# Altium PCB PCB1.PcbDoc
Units mm, origin at the board's own origin, x right, y up, seen from the top; angles counter-clockwise.
Board outline 46.6 x 46.1 mm, 4 copper layers (Top Layer, Int1 (GND), Int2 (GND), Bottom Layer), stack 1.369 mm thick; 70 components, 49 nets, 271 pads, 118 vias.
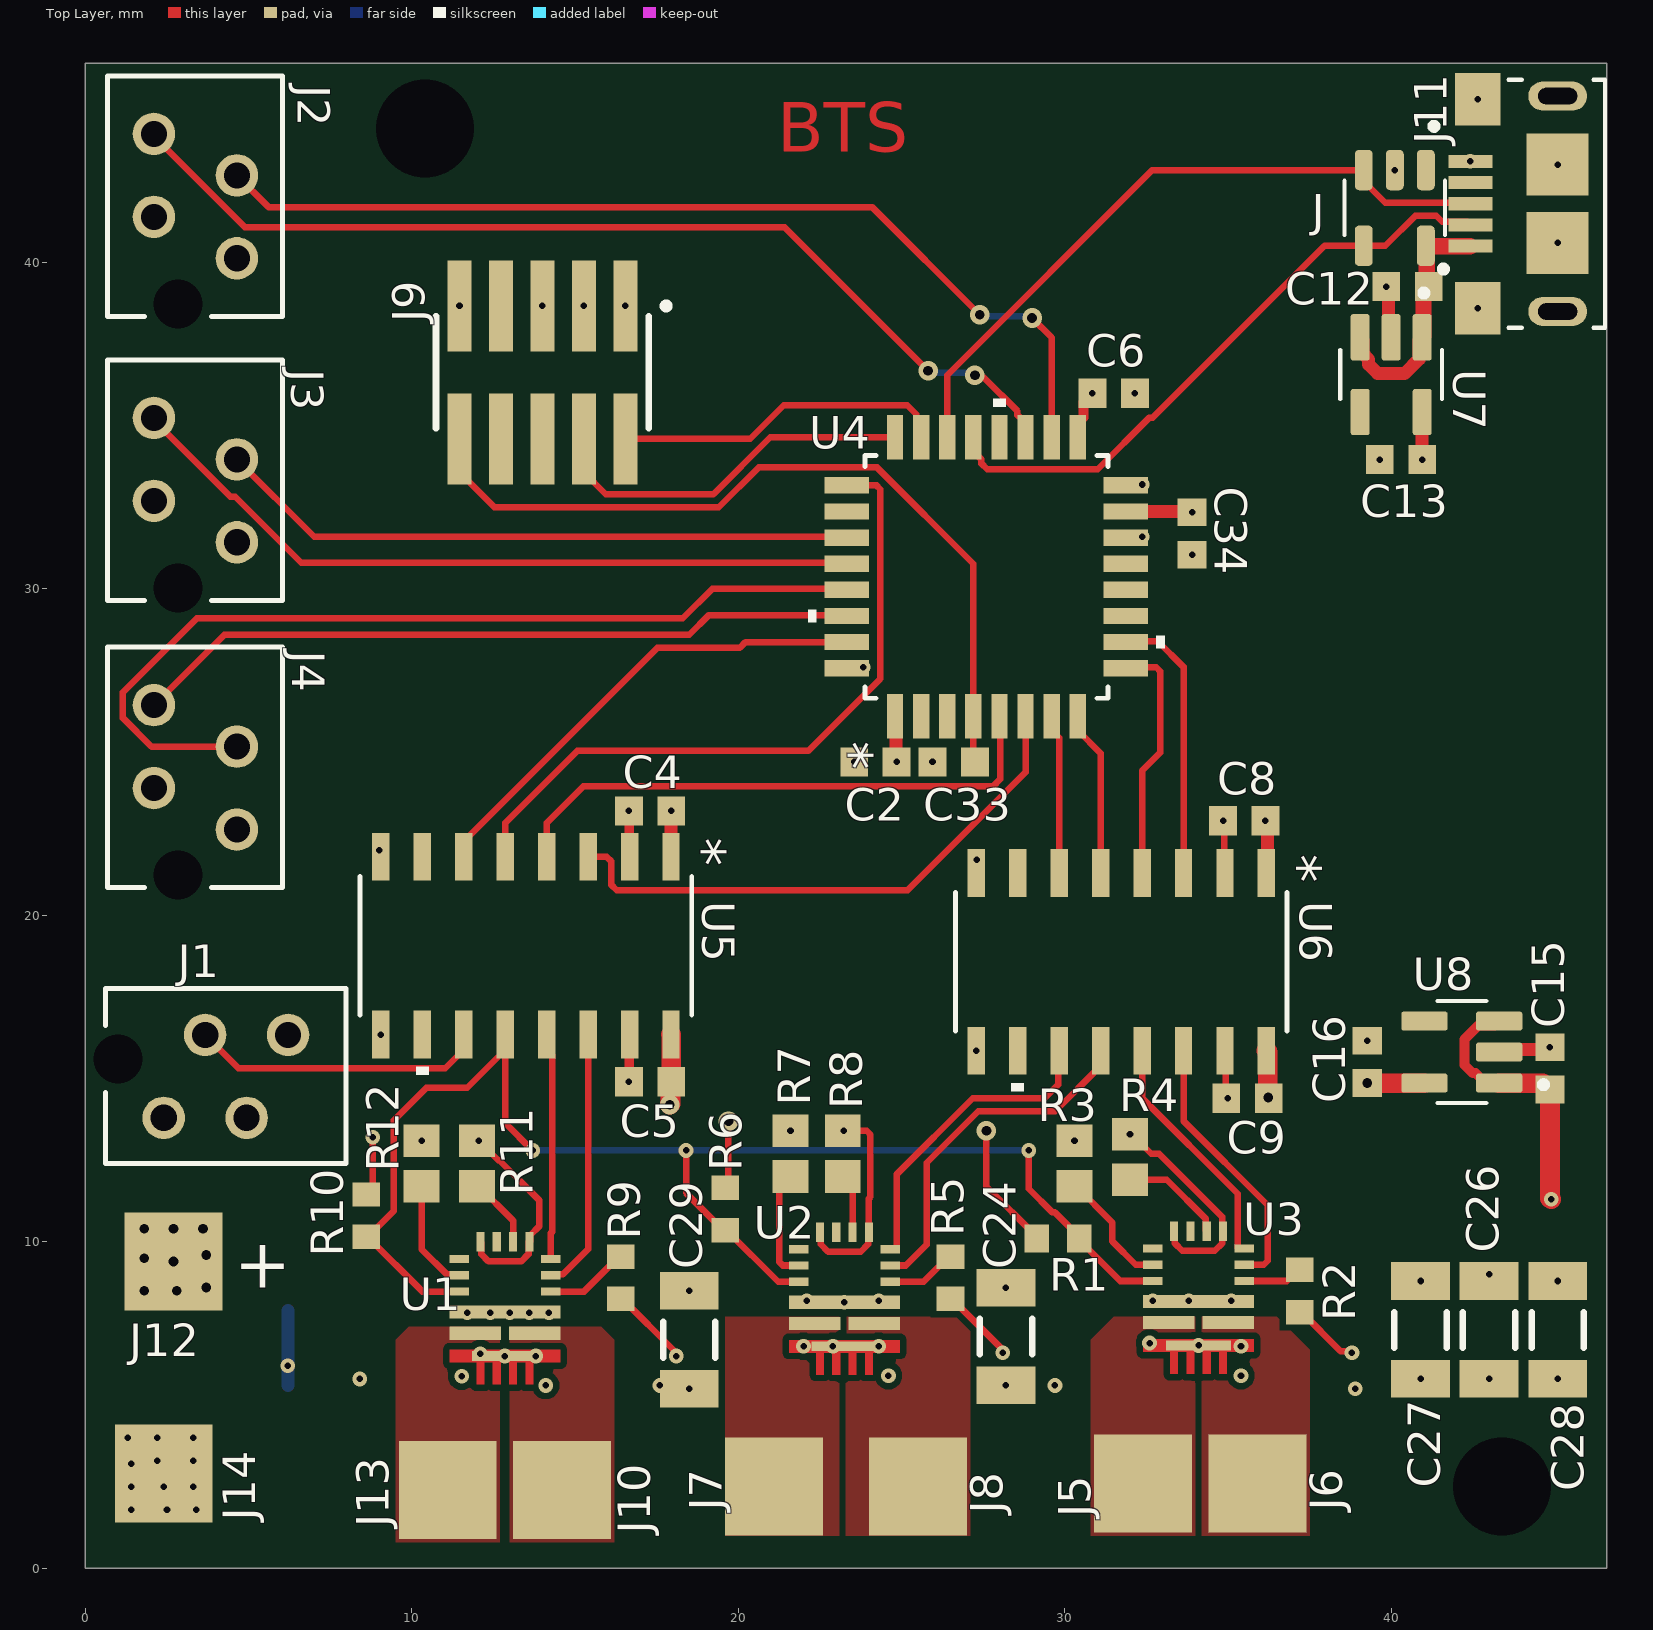
[diagram p0: Top Layer view]
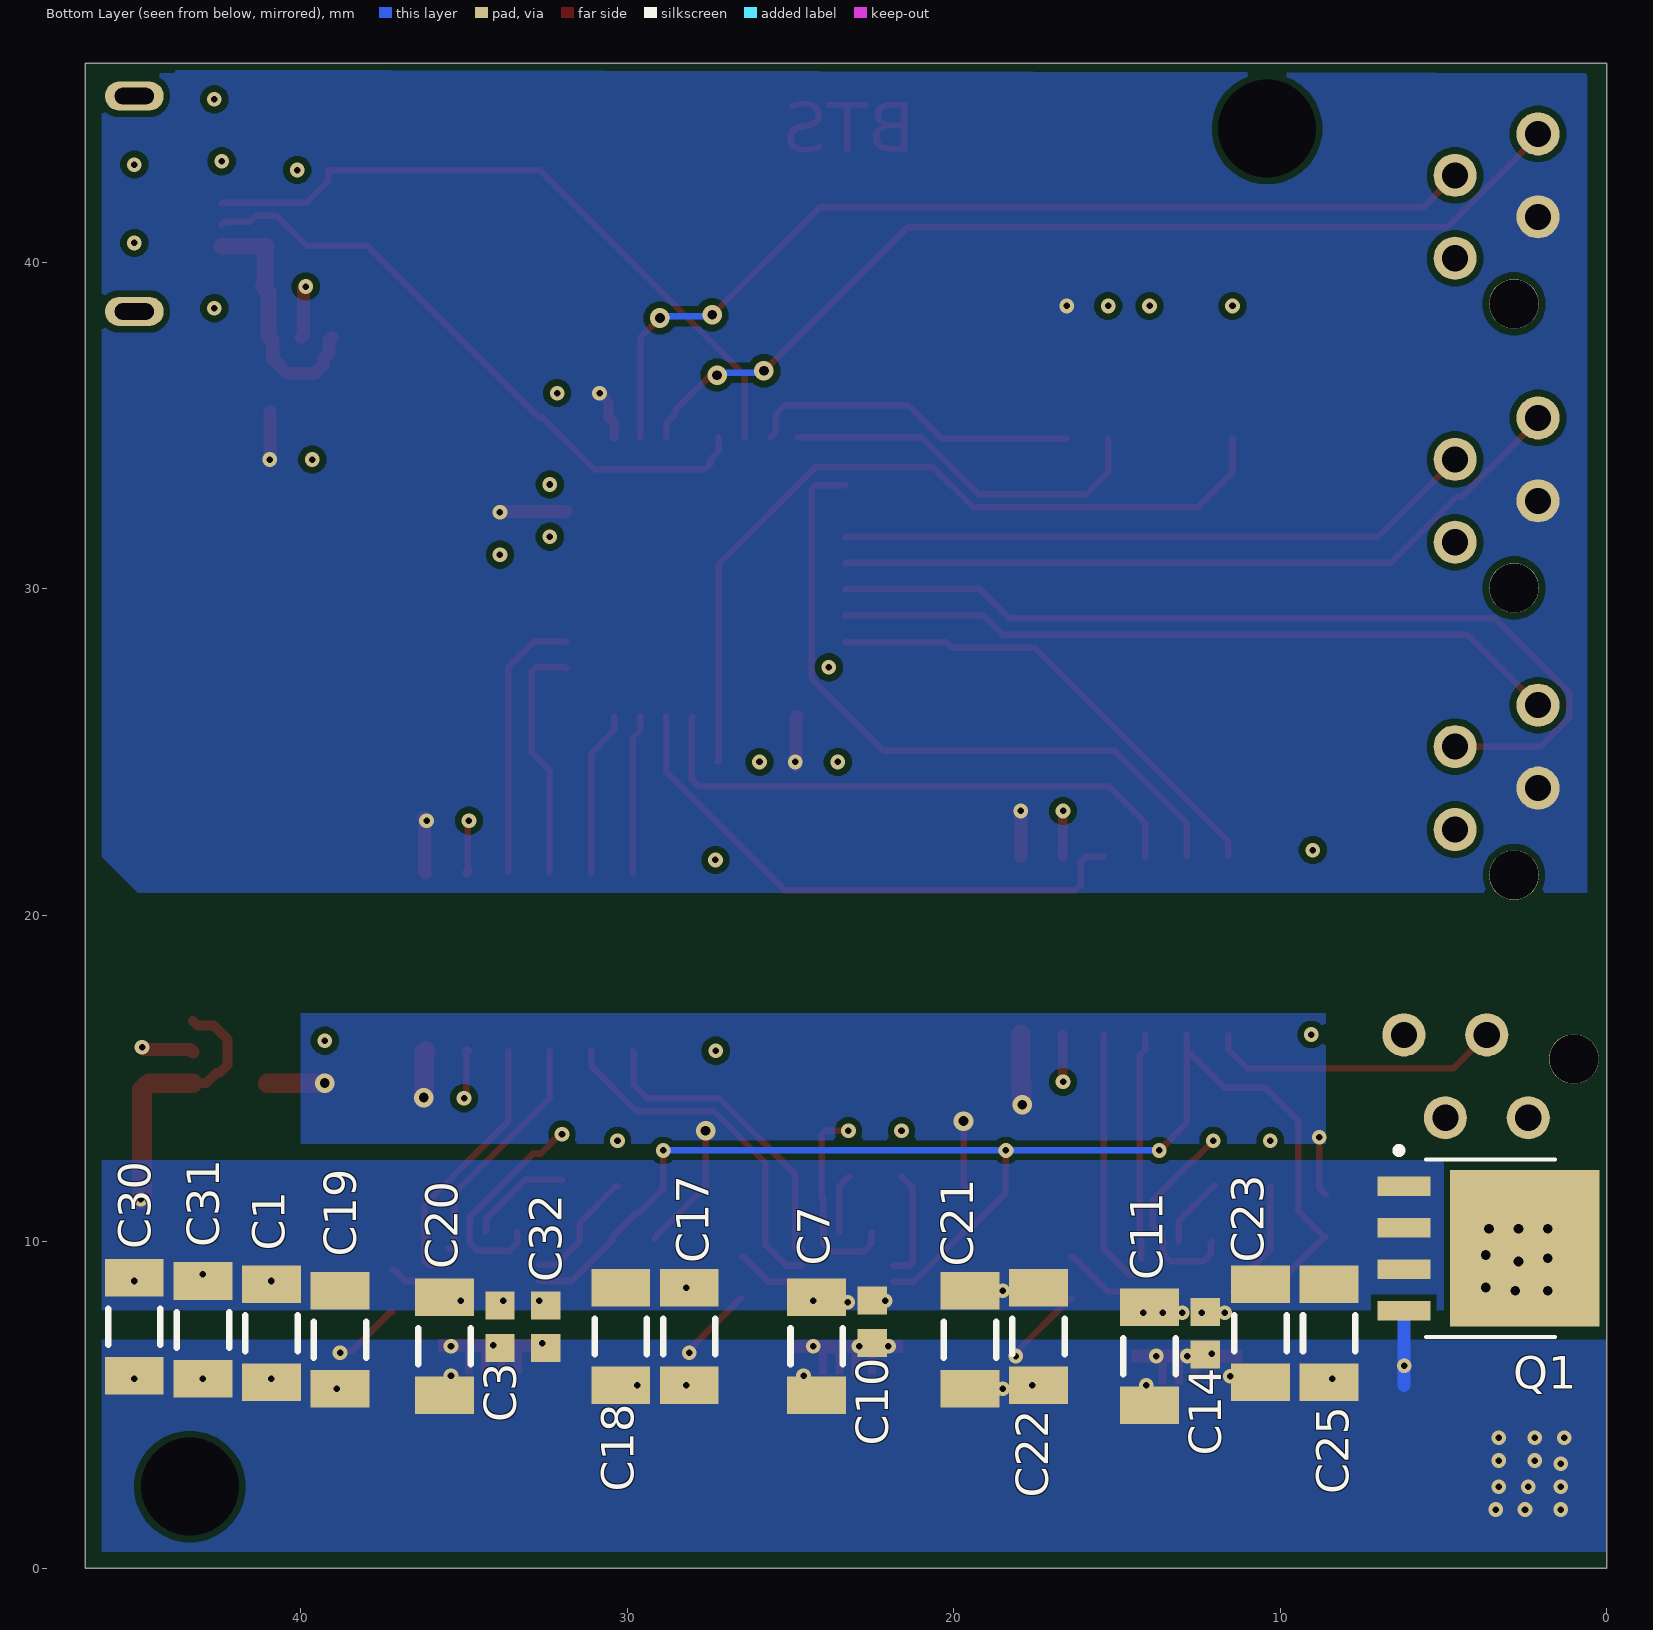
[diagram p1: Bottom Layer view, seen from below]
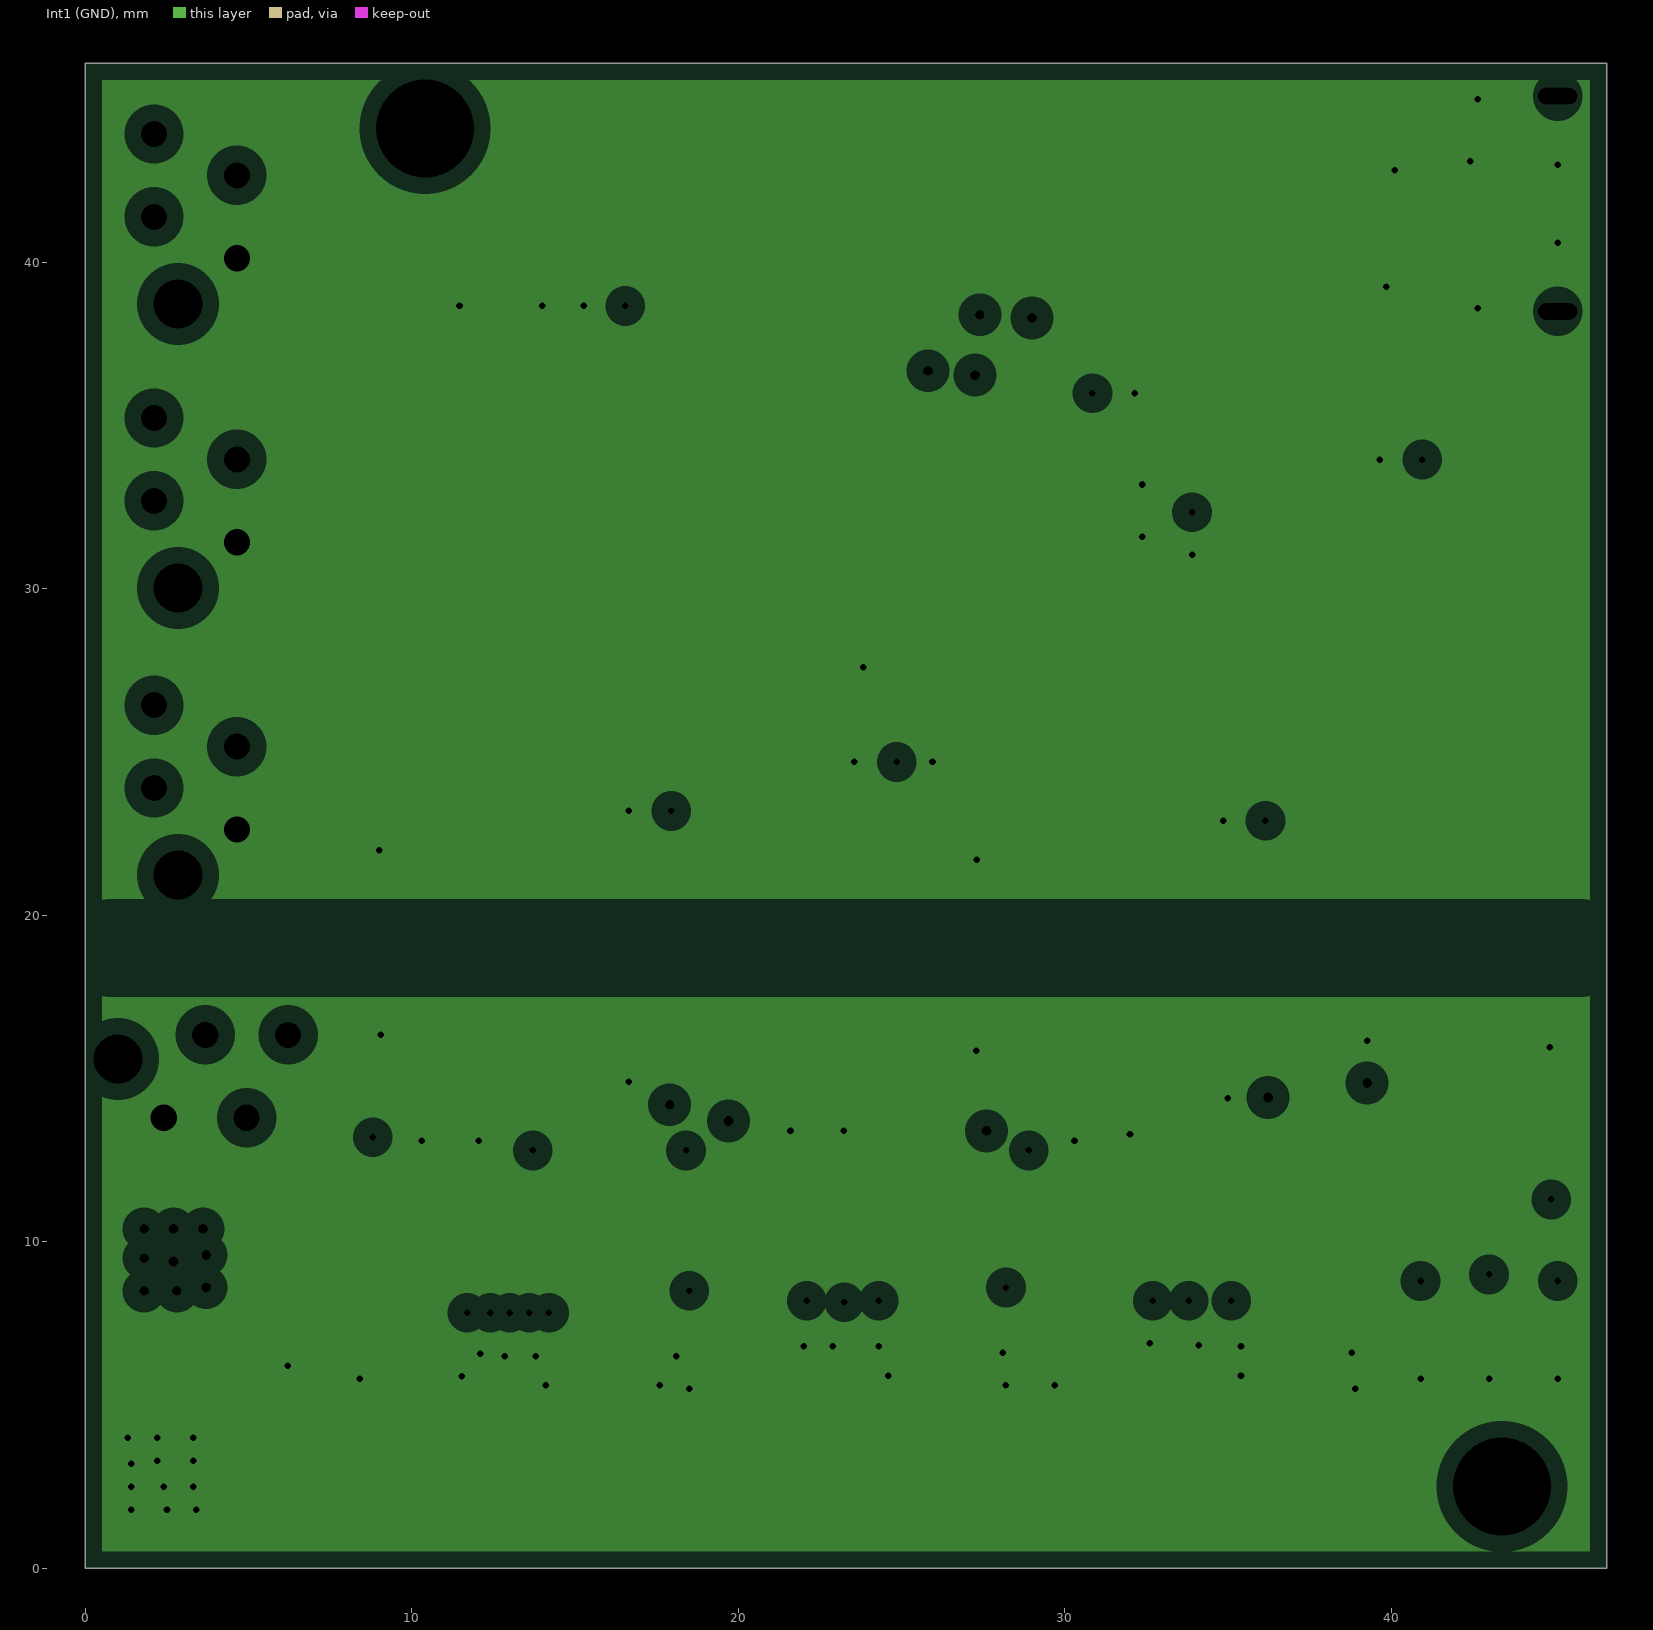
[diagram p2: Int1 (GND), clearances drawn from the general rule]
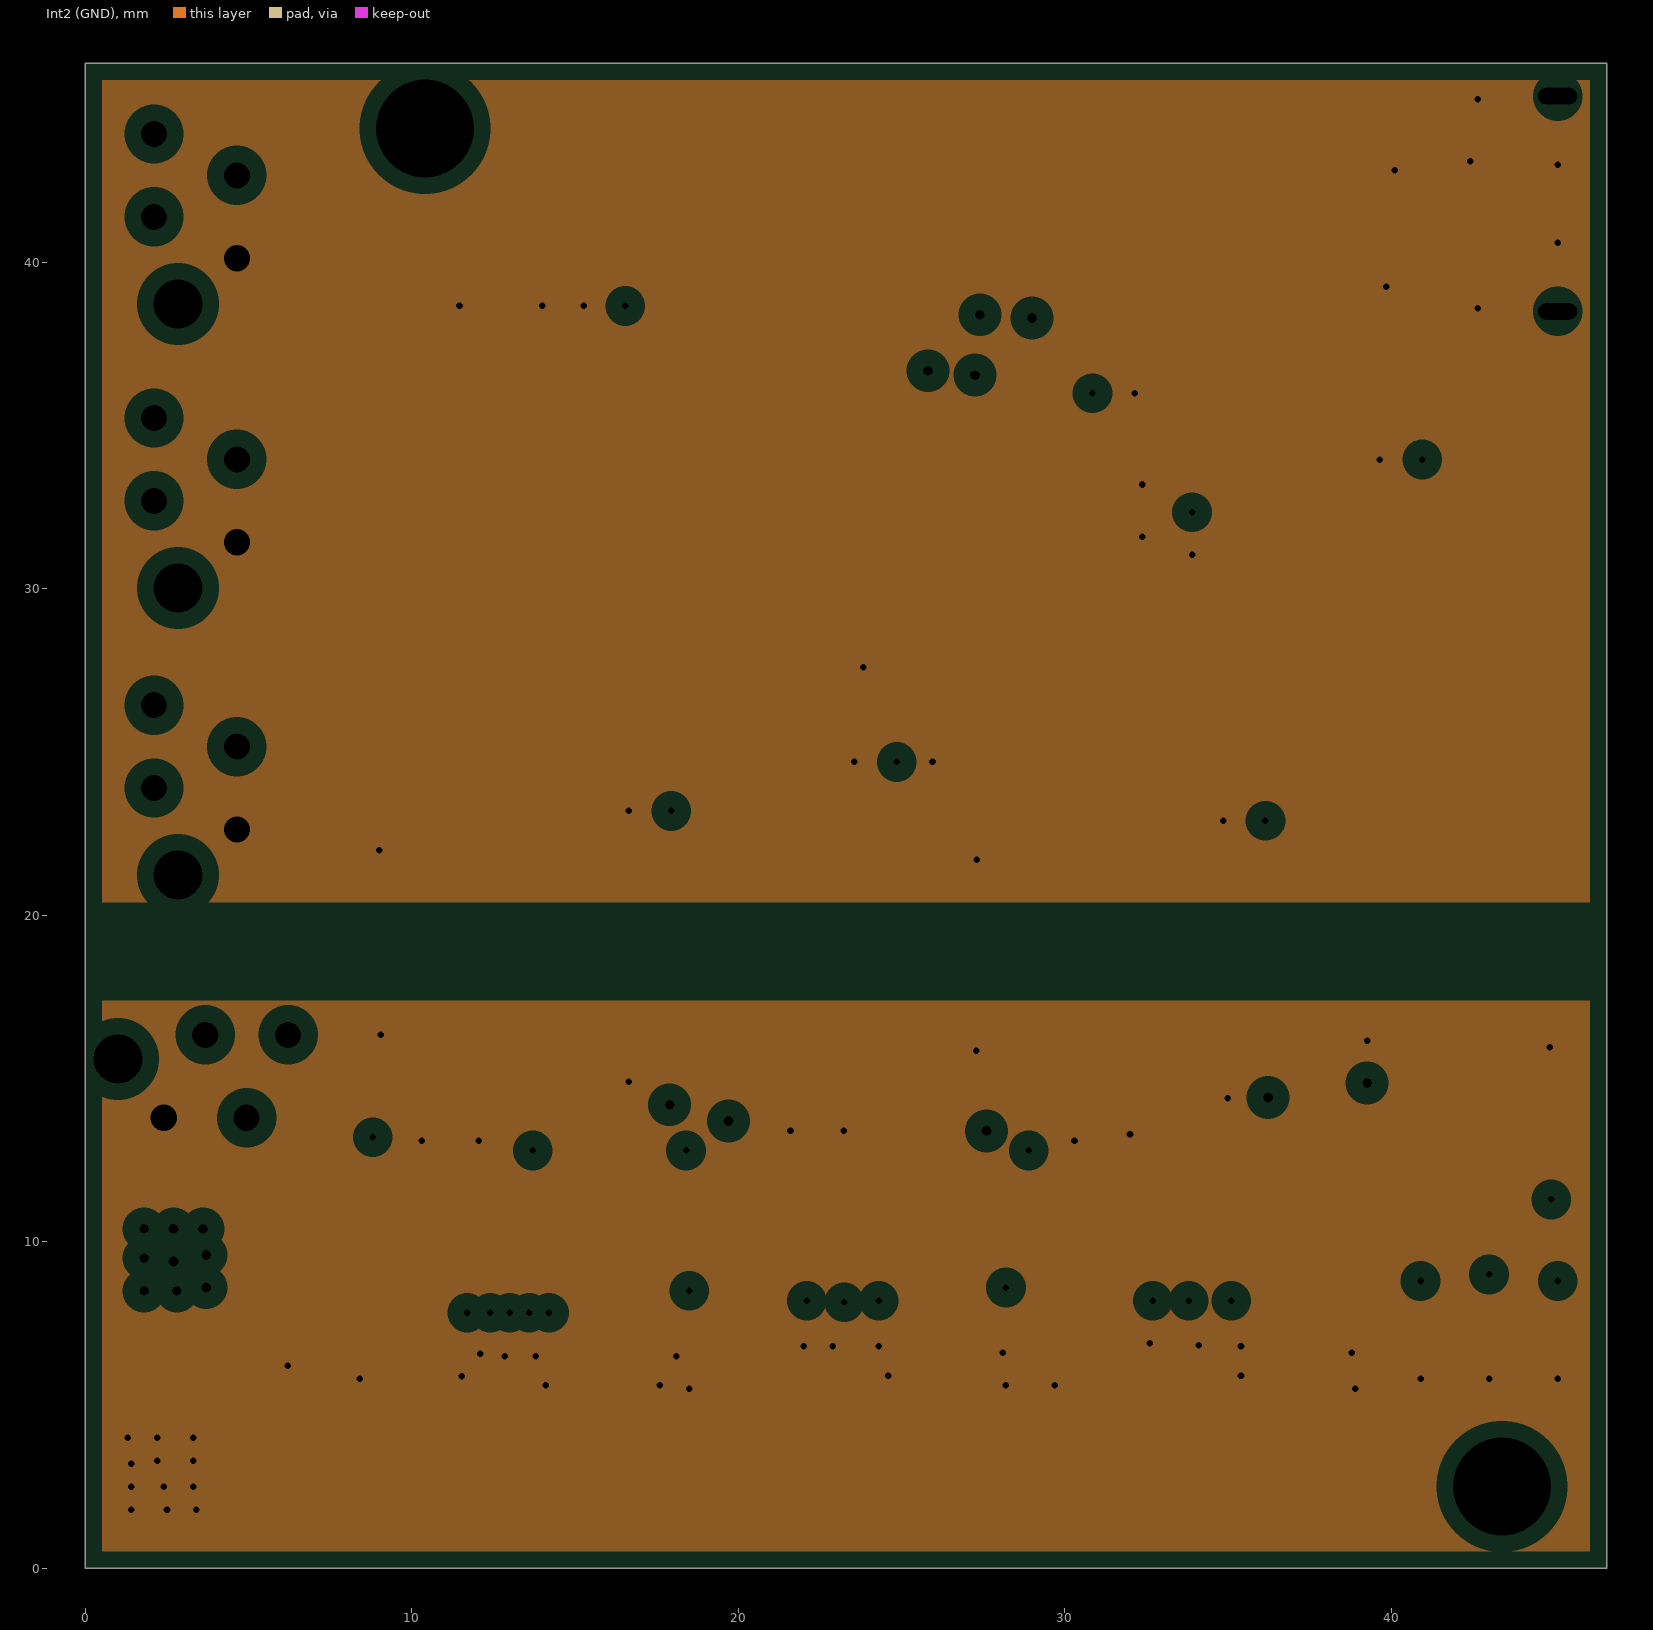
[diagram p3: Int2 (GND), clearances drawn from the general rule]

## Layer stack, top to bottom
Top Solder: solder mask 0.0254, SM-001, Dk 4
Top Layer: signal copper 0.035
Dielectric 1: prepreg 0.1295, PP-017, Dk 4.3
Dielectric 2: prepreg 0.1295, PP-017, Dk 4.3
Int1 (GND): plane copper 0.035, net (Multiple Nets)
Dielectric 3: core 0.7112, Core-039, Dk 4.8
Int2 (GND): plane copper 0.035, net (Multiple Nets)
Dielectric 4: prepreg 0.1295, PP-017, Dk 4.3
Dielectric 5: prepreg 0.1295, PP-017, Dk 4.3
Bottom Layer: signal copper 0.035
Bottom Solder: solder mask 0.0254, SM-001, Dk 4

## Board outline
0,0 46.6,0 46.6,46.1 0,46.1

## Design rules (kind name [scope] priority, off if disabled: settings)
Clearance [All] p1: gap=0.2 ignorepadtopadclearanceinfootprint=TRUE except(0: Arc-Hole Track-Hole SMDPad-Hole THPad-Hole Via-Hole Fill-Hole Poly-Hole Region-Hole Text-Hole)
PlaneClearance [All] p1: clearance=0.508
PlaneConnect [All] p1: planeconnectstyle=Direct reliefexpansion=0.508 reliefentries=4 reliefconductorwidth=0.254 reliefairgap=0.254
PolygonConnect [All] p1: connectstyle=Direct reliefconductorwidth=0.254 reliefentries=4 polygonreliefangle="90 Angle" airgapwidth=0.254
RoutingVias [All] p1: holewidth=0.3 width=0.6 viastyle="Through Hole" minholewidth=0.2 minwidth=0.45 maxholewidth=3 maxwidth=5
SolderMaskExpansion SolderMaskExpansionTentedVias [IsVia] p1: expansion=0.102 istentingtop=TRUE
SolderMaskExpansion [All] p2: expansion=0.05 istentingtop=FALSE
Width [All] p1: maxlimit=5 minlimit=0.2 preferedwidth=0.3
28 further rules are at their usual default settings.

## Components (designator, comment, footprint, x,y, rotation, side; value= is the part's Value field where it differs from the comment)
C1 "CAP 10uF" CAPC1206(3216)190_N 40.9,7.2 r90 bottom value=10uF
C2 "100nF" CAPC1608X90X35LL15T15 24.2,24.7 r180 top
C3 "100nF" CAPC1608X90X35LL15T15 33.9,7.4 r90 bottom
C4 "100nF" CAPC1608X90X35LL15T15 17.3,23.2 r180 top
C5 "100nF" CAPC1608X90X35LL15T15 17.3,14.9 r0 top
C6 "100nF" CAPC1608X90X35LL15T15 31.5,36 r180 top
C7 "CAP 10uF" CAPC1206(3216)190_N 24.2,6.8 r270 bottom value=10uF
C8 "100nF" CAPC1608X90X35LL15T15 35.5,22.9 r180 top
C9 "100nF" CAPC1608X90X35LL15T15 35.6,14.4 r0 top
C10 "100nF" CAPC1608X90X35LL15T15 22.5,7.55 r90 bottom
C11 "CAP 10uF" CAPC1206(3216)190_N 14,6.5 r270 bottom value=10uF
C12 "1uF" CAPC1608X90X35LL15T15 40.5,39.265 r180 top
C13 "1uF" CAPC1608X90X35LL15T15 40.3,33.965 r180 top
C14 "100nF" CAPC1608X90X35LL15T15 12.3,7.2 r90 bottom
C15 "1uF" CAPC1608X90X35LL15T15 44.865,15.313 r90 top
C16 "1uF" CAPC1608X90X35LL15T15 39.265,15.513 r90 top
C17 "CAP 10uF" CAPC1206(3216)190_N 28.1,7.1 r90 bottom value=10uF
C18 "CAP 10uF" CAPC1206(3216)190_N 30.2,7.1 r90 bottom value=10uF
C19 "CAP 10uF" CAPC1206(3216)190_N 38.8,7 r90 bottom value=10uF
C20 "CAP 10uF" CAPC1206(3216)190_N 35.6,6.8 r90 bottom value=10uF
C21 "CAP 10uF" CAPC1206(3216)190_N 19.5,7 r90 bottom value=10uF
C22 "CAP 10uF" CAPC1206(3216)190_N 17.4,7.1 r90 bottom value=10uF
C23 "CAP 10uF" CAPC1206(3216)190_N 10.6,7.2 r90 bottom value=10uF
C24 "CAP 10uF" CAPC1206(3216)190_N 28.2,7.1 r90 top value=10uF
C25 "CAP 10uF" CAPC1206(3216)190_N 8.5,7.2 r90 bottom value=10uF
C26 "CAP 10uF" CAPC1206(3216)190_N 43,7.3 r90 top value=10uF
C27 "CAP 10uF" CAPC1206(3216)190_N 40.9,7.3 r90 top value=10uF
C28 "CAP 10uF" CAPC1206(3216)190_N 45.1,7.3 r90 top value=10uF
C29 "CAP 10uF" CAPC1206(3216)190_N 18.5,7 r90 top value=10uF
C30 "CAP 10uF" CAPC1206(3216)190_N 45.1,7.4 r90 bottom value=10uF
C31 "CAP 10uF" CAPC1206(3216)190_N 43,7.3 r90 bottom value=10uF
C32 "10uF" CAPC1608X90X35LL15T15 32.5,7.4 r90 bottom
C33 "100nF" CAPC1608X90X35LL15T15 26.6,24.7 r0 top
C34 "100nF" CAPC1608X90X35LL15T15 33.9,31.7 r270 top
J "SOT23−5" CM1223-02SO 41,41.8 r270 top
J1 "215079-4" "Micro-MaTch 215079-4" 386.575,19.388 r180 top
J2 "215079-4" "Micro-MaTch 215079-4" -0.948,424.305 r270 top
J3 "215079-4" "Micro-MaTch 215079-4" -0.948,415.605 r270 top
J4 "215079-4" "Micro-MaTch 215079-4" -0.948,406.805 r270 top
J5 "M3_3" J 79.263,61.401 r0 top
J6 "M3_1" J 82.763,61.401 r0 top
J7 "M2_2" J 67.963,61.301 r0 top
J8 "M2_1" J 72.363,61.301 r0 top
J9 "Samtec FTSH-105-01-L-DV-K" "Samtec FTSH-105-01-L-DV-K" 14.635,33.841 r180 top
J10 "M1_2" J 57.963,61.201 r0 top
J11 "10118193-0001LF" "Amphenol 10118193-0001LF" 45.1,41.8 r90 top
J12 "" J 49.563,68.201 r0 top
J13 "M1_1" J 61.463,61.201 r0 top
J14 "" J 49.263,61.701 r0 top
Q1 "BUK6Y10-30P" BUK6Y10-30P 22.102,11.451 r270 bottom
R1 "ERJ3EKF1002V" RESC1609X55X30LL15T15 29.8,10.1 r0 top
R2 "ERJ3EKF1002V" RESC1609X55X30LL15T15 37.2,8.5 r90 top
R3 "3.3k" RESC1608X55X30ML20T20 30.3,12.4 r270 top
R4 "100k" RESC1608X55X30ML20T20 32,12.6 r270 top
R5 "ERJ3EKF1002V" RESC1609X55X30LL15T15 26.5,8.9 r90 top
R6 "ERJ3EKF1002V" RESC1609X55X30LL15T15 19.6,11 r270 top
R7 "3.3k" RESC1608X55X30ML20T20 21.6,12.7 r270 top
R8 "100k" RESC1608X55X30ML20T20 23.2,12.7 r270 top
R9 "ERJ3EKF1002V" RESC1609X55X30LL15T15 16.4,8.9 r90 top
R10 "ERJ3EKF1002V" RESC1609X55X30LL15T15 8.6,10.8 r270 top
R11 "100k" RESC1608X55X30ML20T20 12,12.4 r270 top
R12 "3.3k" RESC1608X55X30ML20T20 10.3,12.4 r270 top
U1 "DRV8243" DRV8243 12.85,7.85 r0 top
U2 "DRV8243" DRV8243 23.25,8.15 r0 top
U3 "DRV8243" DRV8243 34.1,8.175 r0 top
U4 "Microcontroller" STM32G441KB 27.6,30.374 r90 top
U5 "MAX14930DASE+" MAX14930DASE+ -83.152,147.853 r270 top
U6 "MAX14930DASE+" MAX14930DASE+ -64.912,147.353 r270 top
U7 "NCP164CSN330T1G" NCV8730ASN500T1G 40,36.565 r270 top
U8 "NCV8730ASN500T1G" NCV8730ASN500T1G 42.165,15.813 r180 top

## Footprints (in the part's own frame and the unit in brackets; to place one, negate y for a bottom-side part, rotate by r counter-clockwise, add the part's x,y. Pads: shape width x height; smd on the part's side, far side on the other; paste and mask are expansions set on the pad)
"Amphenol 10118193-0001LF" [mm] "USB connector"
  rect 0.4x1.35 smd: 1(-1.3,2.675) 2(-0.65,2.675) 3(0,2.675) 4(0.65,2.675) 5(1.3,2.675)
  rect 1.6x1.4 smd: S1(-3.2,2.45) S2(3.2,2.45)
  rect 1.9x1.9 smd: S3(1.2,0) S4(-1.2,0)
  oval 0.9x1.8 hole 0.5 slot 1.2 at 90 deg: S5(-3.3,0) S6(3.3,0)
  round 0.5 hole 0.5 unplated: ""(-3.3,0) ""(3.3,0)
  silkscreen extent -3.8,-1.45 3.8,3.6, body extent -4.06,-2.79 3.8,2.92, height 2.81
BUK6Y10-30P [mm]
  rect 4.8x4.58 smd paste-3: D(1.651,19.602)
  rect 0.6x1.62 smd: G(3.556,15.892) S(-0.254,15.892) S(1.016,15.892) S(2.286,15.892)
  silkscreen extent -1.45,15.64 4.37,20.52
CAPC1206(3216)190_N [mm] "Chip Capacitor, Body 3.2x1.6mm, Height 1.9mm, IPC Medium Density"
  rect 1.15x1.8 smd: 1(-1.5,0) 2(1.5,0)
  silkscreen extent -0.55,-0.8 0.55,0.8, body extent -1.7,-0.9 1.7,0.9, height 1.9
CAPC1608X90X35LL15T15 [mm] "Chip Capacitor, 2-Leads, Body 1.60x0.81mm, IPC High Density"
  rect 0.85x0.9 smd: 1(-0.65,0) 2(0.65,0)
  body extent -0.88,-0.48 0.87,0.48, height 0.9
CM1223-02SO [mm]
  rrect50% 1.24x0.55 smd: 1(-1.033,0.061) 2(-1.033,-0.889) 3(-1.033,-1.839) 4(1.287,-1.839) 5(1.287,0.061)
  silkscreen extent -2.47,-2.43 0.96,0.65, body extent -1.27,-2.35 1.53,0.55, height 1.31
DRV8243 [mm]
  rect 0.6x0.25 smd: 1(-1.4,1.625) 2(-1.4,1.125) 3(-1.4,0.625) 8(1.4,0.625) 9(1.4,1.125) 10(1.4,1.625)
  rect 3.4x0.4 smd: 4(0,0)
  rect 1.575x0.4 smd mask+0.102: 5(-0.913,-0.65) 7(0.913,-0.65)
  rect 2x0.3 smd: 6(0,-1.35)
  rect 0.25x0.6 smd: 11(0.75,2.15) 12(0.25,2.15) 13(-0.25,2.15) 14(-0.75,2.15)
  Top Layer region: -1.7,-1.55 1.7,-1.55 1.7,-1.15 -1.7,-1.15
  Top Layer region: -0.875,-2.224 -0.625,-2.224 -0.625,-1.524 -0.875,-1.524
  Top Layer region: 0.625,-2.224 0.875,-2.224 0.875,-1.524 0.625,-1.524
  Top Layer region: -0.375,-2.224 -0.125,-2.224 -0.125,-1.524 -0.375,-1.524
  Top Layer region: 0.125,-2.224 0.375,-2.224 0.375,-1.524 0.125,-1.524
J [mm]
  rect 3x3 smd: 1(-46.863,-58.801)
MAX14930DASE+ [mil]
  rect 57.55x21 smd paste+0 mask+0: 1(4962.73,3980) 2(4962.73,3930) 3(4962.73,3880) 4(4962.73,3830) 5(4962.73,3780) 6(4962.73,3730) 7(4962.73,3680) 8(4962.73,3630) 9(5177.27,3630) 10(5177.27,3680) 11(5177.27,3730) 12(5177.27,3780) 13(5177.27,3830) 14(5177.27,3880) 15(5177.27,3930) 16(5177.27,3980)
  silkscreen extent 4986,3605 5226,4005, body extent 4948,3610 5192,4000, height 69
"Micro-MaTch 215079-4" [mm]
  round 1.3 / inner round 1.321 / far side round 1.321 hole 0.8 mask+0: 1(384.175,5.588) 2(382.905,3.048) 3(381.635,5.588) 4(380.365,3.048)
  round 0 / inner round 1.524 / far side round 1.524 hole 1.5 unplated: 5(385.572,3.785)
  silkscreen extent 378.59,1.63 385.95,6.99, body extent 378.75,1.82 385.79,6.82, height 3.51
NCV8730ASN500T1G [mm]
  rrect25% 1.42x0.58 smd: 1(-1.145,0.95) 2(-1.145,0) 3(-1.145,-0.95) 4(1.145,-0.95) 5(1.145,0.95)
  silkscreen extent -2.6,-1.56 0.75,1.56, body extent -1.34,-1.5 1.41,1.5, height 1.1
RESC1608X55X30ML20T20 [mm] "Chip Resistor, 2-Leads, Body 1.60x0.80mm, IPC Low Density"
  rect 1x1.1 smd: 1(-0.7,0) 2(0.7,0)
  body extent -0.9,-0.5 0.9,0.5, height 0.55
RESC1609X55X30LL15T15 [mm] "Chip Resistor, 2-Leads, Body 1.75x0.95mm, IPC High Density"
  rect 0.75x0.85 smd: 1(-0.65,0) 2(0.65,0)
  body extent -0.87,-0.48 0.87,0.48, height 0.55
"Samtec FTSH-105-01-L-DV-K" [mm]
  rect 0.74x2.79 smd: 01(-1.905,-4.829) 02(-1.905,-0.759) 03(-0.635,-4.829) 04(-0.635,-0.759) 05(0.635,-4.829) 06(0.635,-0.759) 07(1.905,-4.829) 08(1.905,-0.759) 09(3.175,-4.829) 10(3.175,-0.759)
  silkscreen extent -3.25,-4.93 3.9,-1.08, body extent -2.55,-5.72 3.8,0.12, height 5.73
STM32G441KB [mm] "Microcontroller"
  rect 1.359x0.501 smd paste+0 mask+0: 1(-4.274,2.8) 2(-4.274,2) 3(-4.274,1.2) 4(-4.274,0.4) 5(-4.274,-0.4) 6(-4.274,-1.2) 7(-4.274,-2) 8(-4.274,-2.8) 17(4.274,-2.8) 18(4.274,-2) 19(4.274,-1.2) 20(4.274,-0.4) 21(4.274,0.4) 22(4.274,1.2) 23(4.274,2) 24(4.274,2.8)
  rect 0.501x1.359 smd paste+0 mask+0: 9(-2.8,-4.274) 10(-2,-4.274) 11(-1.2,-4.274) 12(-0.4,-4.274) 13(0.4,-4.274) 14(1.2,-4.274) 15(2,-4.274) 16(2.8,-4.274) 25(2.8,4.274) 26(2,4.274) 27(1.2,4.274) 28(0.4,4.274) 29(-0.4,4.274) 30(-1.2,4.274) 31(-2,4.274) 32(-2.8,4.274)
  silkscreen extent -3.72,-5.46 5.46,5.46, body extent -4.6,-4.6 4.6,4.6, height 1.6

## Part data
C1 C7 C11 C17 C18 C19 C20 C21 C22 C23 C24 C25 C26 C27 C28 C29 C30 C31: library part CMP-1037-04981-1, "CAP 10uF 25V -20% to +80% 1206 (3216 Metric) Thickness 1.9mm SMD", Case-EIA=1206, Case-Metric=3216, Rated Voltage="25 V", Tolerance="-20% to +80%", Max Thickness="1.9 mm", Technology=SMT
C2 C3 C4 C5 C6 C8 C9 C10 C12 C13 C14 C15 C16 C32 C33 C34: library part CMP-2006-02117-1, Manufacturer="AVX Interconnect / Elco", Part Number=06035C104J4Z2A
J: library part "CM1223-02SO TVS diode array", "USB protection"
J1: library part "Micro-MaTch 215079-4_1", "Thrower ESC connector"
J2 J3 J4: library part "Micro-MaTch 215079-4_1", "Encoder connectors"
J5 J6 J7 J8 J10 J12 J13 J14: library part J
J9: "Programmer connector"
J11: library part "Amphenol 10118193-0001LF", "USB connector"
Q1: "Reverse voltage protection"
R1 R2 R5 R6 R9 R10: library part CMP-1012-00623-3, "Chip Resistor, 10 KOhm, +/- 1%, 0.1 W, -55 to 155 degC, 0603 (1608 Metric), RoHS, Tape and Reel", Case Code (Imperial)=0603, Case Code (Metric)=1608, Manufacturer=Panasonic, Max Operating Temperature=155degC, Max Power Dissipation=100mW, Min Operating Temperature=-55degC, Package Description="2-Pin Surface Mount Device, Body 1.6 x 0.85 mm", Package Quantity=1, Package Reference=603, Resistance=10k, Temperature Coefficient=100ppm\/degreesC, Tolerance=1%, Voltage Rating=75V, Case\/Package=0603, Composition=ThickFilm, Contact Plating=Tin, Datasheet URL=https://industrial.panasonic.com/cdbs/www-data/pdf/RDA0000/AOA0000C304.pdf, Datasheet Version=02/2017, Depth=0.8mm, Height=0.45mm, Lead Free=LeadFree, Length=1.6mm, Manufacturer URL=http://www.panasonic.com/, Military Standard=Not, Mount=SurfaceMount, Mounting Technology=SurfaceMount, Number of Pins=2, Number of Terminations=2, Packaging=TapeandReel, Power Rating=100mW, Radiation Hardening=No, REACH SVHC=NoSVHC, RoHSCompliant=true, Termination=SMD/SMT, Voltage Rating (DC)=75V, Width=0.031inch
R3 R7 R12: library part CMP-2000-00040-1, Manufacturer=Panasonic, Part Number=ERA3AEB332V
R4 R8 R11: library part CMP-2000-00875-1, Manufacturer=Panasonic, Part Number=ERA3AEB104V
U1 U2 U3: "DRV8243-Q1 Automotive H-Bridge Driver with Integrated Current Sense and Diagnostics"
U4: library part STM32G441KBT3
U5 U6: "Isolator. Signals between the microcontroller and motor drivers should go through isolator(s)."
U7: "Input: 5V from USB. / Output: 3.3V, >200mA / For powering the microcontroller, encoders, isolators."
U8: "Input: 4S battery voltage (up to 16.8V) / Output: 5V, >50mA / For powering the isolators, driver pullup resistors."

## Free pads (board coordinates)
  round 0 hole 3: 2(10.4,44.1) 2(43.4,2.5)

## Via types
v1: diameter 0.45, hole 0.2, Top Layer to Bottom Layer, tented both sides, 100 vias
v2: diameter 0.6, hole 0.3, Top Layer to Bottom Layer, tented both sides, 18 vias

## Nets (pads, with @x,y where several pads share a name; then routed paths per layer and width w, separated by ;. In a path a pad name is that pad's centre, name@x,y a point inside that pad or via, vN(x,y) a via of type N, cw(c..) or ccw(c..) an arc to the next point about the centre after c; other vN are vias at no path point)
+3.3: C2.1 C4.1 C6.2 C8.1 C13.1 C34.1 J2.2 J3.2 J4.2 J9.01 U4.1 U4.15 U4.17 U5.1 U6.1 U7.5 | length 9.7
  Top Layer w0.3: U4.17 30.4,35.076 30.575,35.251 30.575,35.725 v1(30.85,36)
  Top Layer w0.4: U5.1 17.945,21.805 17.945,23.195 v1(17.95,23.2) ; U4.1 24.825,26.075 24.825,24.725 v1(24.85,24.7) 24.85,24.65 24.875,24.625 C2.1@24.85,24.6 ; U4.15 33.876,32.374 v1(33.9,32.35) ; U6.1 36.215,21.335 36.215,22.985 36.2,23 C8.1@36.25,23 ; v1(40.95,33.965) U7.5
  other v1: 36.15,22.9 16.54,38.67
+5: C5.2 C9.2 C16.1 R1.1 R6.1 R10.1 U5.16 U6.16 U8.5 | length 13.3
  Top Layer w0.2: R10.1 8.8,11.65 v1(8.8,13.2) ; R6.1 19.7,11.75 v2(19.7,13.7) ; v2(27.6,13.4) 27.6,11.7 29.15,10.15 R1.1
  Top Layer w0.6: v2(17.9,14.2) 17.925,14.225 17.925,14.85 17.945,14.87 17.945,16.345 U5.16 ; U6.16 36.215,15.815 36.215,14.435 C9.2 ; v2(39.265,14.863) U8.5
  other v2: 36.233,14.417
+5_USB: C12.1 J11.1 J.5 U7.1 U7.3 | length 7.8
  Top Layer w0.4: U7.3 39.14,37.62 39.14,37.2 39.31,37.03 39.31,36.877 39.587,36.6 40.413,36.6 40.86,37.047 40.86,37.62 U7.1
  Top Layer w0.5: U7.1 40.99,37.75 40.99,39.105 C12.1 41.086,39.329 41.086,40.488 J.5 41.074,40.5 J11.1
+16: C1.2 C3.2 C7.1 C10.2 C11.1 C14.2 C15.1 C17.2 C18.2 C19.2 C20.2 C21.2 C22.2 C23.2 C24.2 C25.2 C26.2 C27.2 C28.2 C29.2 C30.2 C31.2 C32.2 Q1.S U1.4 U2.4 U3.4 U8.1 U8.3 | length 8.4
  Top Layer w0.3: U8.1 42.89,14.863 42.58,15.173 42.497,15.173 42.25,15.421 42.25,16.206 42.667,16.623 43.17,16.623 U8.3
  Top Layer w0.6: U8.1 43.32,14.853 44.65,14.853 44.715,14.788 44.74,14.788 C15.1 44.865,11.335 v1(44.9,11.3)
  other v1: 11.7,7.825 12.4,7.825 13,7.825 13.6,7.825 14.2,7.825 23.25,8.15 22.1,8.2 24.3,8.2 32.7,8.2 33.8,8.2 35.1,8.2 18.5,8.5 28.2,8.6 40.9,8.8 45.1,8.8 43,9
GND: C2.2 C4.2 C6.1 C8.2 C12.2 C13.2 C33.1 C34.2 J2.1 J3.1 J4.1 J9.03 J9.05 J9.09 J11.5 J11.S1 J11.S2 J11.S3 J11.S4 J11.S5 J11.S6 J.2 U4.14 U4.16 U4.32 U5.2 U5.8 U6.2 U6.8 U7.2 | length 4.7
  Top Layer w0.2: U6.2@34.88,21.33 C8.2@34.88,22.87
  Top Layer w0.3: v1(16.65,23.2) 16.66,23.19 16.66,21.81 U5.2 ; v1(34.85,22.9) C8.2@34.88,22.87 ; U6.2@34.88,21.33 U6.2
  Top Layer w0.4: v1(39.85,39.265) 39.925,39.19 39.925,37.785 U7.2
  other v1: 27.3,21.7 9,22 23.55,24.7 25.95,24.7 23.826,27.6 33.9,31.05 32.374,31.6 32.374,33.2 39.65,33.965 32.15,36 42.65,38.6 11.46,38.67 14,38.67 15.27,38.67 45.1,40.6 40.111,42.833 45.1,43 42.425,43.1 42.65,45
M1_DIR: U1.10 U5.13 | length 7
  Top Layer w0.2: U5.13 14.13,15.886 14.308,15.709 14.308,10.317 14.25,10.259 U1.10
M1_DIR_Control: U4.5 U5.4 | length 17.4
  Top Layer w0.2: U5.4 14.13,22.831 15.249,23.95 21.524,23.95 27.799,23.95 28.025,24.176 28.025,26.075 U4.5
M1_PWM: U1.9 U5.14 | length 8.1
  Top Layer w0.2: U1.9 14.275,9 14.624,9 15.4,9.776 U5.14
M1_PWM_Control: U4.6 U5.3 | length 17.5
  Top Layer w0.2: U5.3 15.967,21.8 16.103,21.663 16.103,20.945 16.279,20.769 25.184,20.769 28.8,24.385 U4.6
M2_DIR: U2.10 U6.11 | length 9.6
  Top Layer w0.2: U2.10 24.825,9.775 24.85,9.8 24.85,12.064 27.186,14.4 29.38,14.4 29.8,14.82 29.8,15.82 U6.11
M2_DIR_Control: U4.7 U6.6 | length 4.9
  Top Layer w0.2: U4.7 29.6,25.671 29.83,25.441 U6.6
M2_PWM: U2.9 U6.12 | length 10.9
  Top Layer w0.2: U2.9 25.133,9.275 25.775,9.917 25.775,12.424 27.351,14 29.714,14 31.1,15.386 U6.12
M2_PWM_Control: U4.8 U6.5 | length 5.1
  Top Layer w0.2: U4.8 30.4,25.671 31.1,24.971 U6.5
M3_DIR: U3.10 U6.13 | length 7.4
  Top Layer w0.2: U6.13 32.37,14.404 35.3,11.474 35.3,9.825 35.325,9.8 U3.10
M3_DIR_Control: U4.9 U6.4 | length 7.5
  Top Layer w0.2: U4.9 31.9,27.6 32.803,27.6 32.92,27.483 32.92,24.982 32.37,24.432 U6.4
M3_PWM: U3.9 U6.14 | length 8.3
  Top Layer w0.2: U6.14 33.64,13.7 36.217,11.123 36.217,9.417 36.1,9.3 U3.9
M3_PWM_Control: U4.10 U6.3 | length 8.4
  Top Layer w0.2: U4.10 31.9,28.4 32.853,28.4 33.64,27.613 U6.3
NetJ5_1: J5.1 U3.5
NetJ6_1: J6.1 U3.7
NetJ7_1: J7.1 U2.5
NetJ8_1: J8.1 U2.7
NetJ10_1: J10.1 U1.5
NetJ12_1: J12.1 Q1.D
  other v2: 1.8,8.5 2.8,8.5 3.7,8.6 2.7,9.4 1.8,9.5 3.7,9.6 1.8,10.4 2.7,10.4 3.6,10.4
NetJ13_1: J13.1 U1.7
NetR2_2: R2.2 U3.8 | length 1.8
  Top Layer w0.2: U3.8 36.8,8.8 37.15,9.15 R2.2
NetR3_2: R3.2 U3.2 | length 3.7
  Top Layer w0.2: R3.2 30.35,11.7 31.463,10.587 31.463,10.013 32.176,9.3 U3.2
NetR4_2: R4.2 U3.12 | length 3.2
  Top Layer w0.2: R4.2 33.124,11.9 34.325,10.699 34.325,10.35 U3.12
NetR5_2: R5.2 U2.8 | length 2.2
  Top Layer w0.2: U2.8 25.675,8.775 26.45,9.55 R5.2
NetR7_2: R7.2 U2.2 | length 3.4
  Top Layer w0.2: R7.2 21.25,11.65 21.25,9.392 21.367,9.275 U2.2
NetR8_2: R8.2 U2.12 | length 1.8
  Top Layer w0.2: R8.2 23.5,11.7 U2.12
NetR9_2: R9.2 U1.8 | length 2.6
  Top Layer w0.2: U1.8 15.275,8.475 16.35,9.55 R9.2
NetR11_2: R11.2 U1.12 | length 2.2
  Top Layer w0.2: R11.2 12.05,11.7 13.1,10.65 U1.12
NetR12_2: R12.2 U1.2 | length 3.4
  Top Layer w0.2: R12.2 10.3,9.776 11.076,9 11.425,9 U1.2
NRST: C33.2 J9.10 U4.4 | length 25
  Top Layer w0.2: J9.10 11.46,33.575 12.53,32.505 19.405,32.505 20.624,33.724 24.25,33.724 27.2,30.774 27.2,24.75 C33.2
nSleep: R1.2 R6.2 R10.2 U1.3 U2.3 U3.3 U5.12 | length 42.9
  Top Layer w0.2: R10.2 R10.2@8.65,10.15 ; U1.3 10.325,8.475 R10.2@8.65,10.15 ; U5.12 U5.12@12.86,15.886 ; v1(13.7,12.8) 12.86,13.64 U5.12@12.86,15.886 ; v1(18.4,12.8) 18.4,11.5 19.55,10.35 19.65,10.35 21.225,8.775 U2.3 ; v1(28.9,12.8) 28.9,11.626 29.626,10.9 29.7,10.9 30.45,10.15 R1.2 ; R1.2@30.45,10.05 31.7,8.8 U3.3 ; R10.2@8.65,10.15 9.45,10.95 9.45,13.724 10.448,14.722 11.696,14.722 U5.12@12.86,15.886
  Bottom Layer w0.2: v1(13.7,12.8) v1(18.4,12.8) v1(28.9,12.8)
nSleepMCU: U4.25 U5.5 | length 21.2
  Top Layer w0.2: U5.5 12.86,22.831 15.067,25.038 22.145,25.038 24.351,27.244 24.351,33.056 24.234,33.174 U4.25
PGND: C1.1 C3.1 C5.1 C7.2 C9.1 C10.1 C11.2 C14.1 C15.2 C16.2 C17.1 C18.1 C19.1 C20.1 C21.1 C22.1 C23.1 C24.1 C25.1 C26.1 C27.1 C28.1 C29.1 C30.1 C31.1 C32.1 J1.1 J14.1 Q1.G R2.1 R3.1 R4.1 R5.1 R7.1 R8.1 R9.1 R11.1 R12.1 U1.6 U1.11 U1.14 U2.6 U2.11 U2.14 U3.6 U3.11 U3.14 U5.9 U5.15 U6.9 U6.15 U8.2 | length 33.3
  Top Layer w0.2: v1(12.05,13.1) 12.65,12.5 12.674,12.5 13.908,11.266 13.908,10.483 13.625,10.2 13.625,10.025 U1.11 ; U1.14 12.125,9.975 12.125,9.626 12.351,9.4 13.349,9.4 13.575,9.626 U1.11@13.575,10 ; R9.1 16.45,8.25 18.052,6.648 18.052,6.548 v1(18.1,6.5) ; U2.14 22.525,10.275 22.525,9.926 22.751,9.7 23.749,9.7 23.975,9.926 U2.11@23.975,10.3 ; R8.1@23.25,13.4 R8.1 23.933,13.4 24.05,13.283 24.05,11.376 24,11.326 U2.11 ; R5.1 26.55,8.25 28.052,6.748 28.052,6.648 v1(28.1,6.6) ; v1(32,13.3) 32.05,13.3 32.65,12.7 32.89,12.7 34.825,10.765 34.825,10.175 34.825,9.951 34.599,9.725 33.601,9.725 33.375,9.951 33.375,10.3 U3.14 ; C9.1@34.93,14.47 U6.15@34.93,15.83 ; R2.1 37.25,7.85 38.452,6.648 38.752,6.648 v1(38.8,6.6)
  Top Layer w0.3: v1(16.65,14.9) 16.66,14.91 16.66,16.34 U5.15 ; U6.15 U6.15@34.93,15.83 ; C9.1@34.93,14.47 v1(35,14.4)
  Top Layer w0.4: U8.2 43.385,15.888 44.79,15.888 v1(44.865,15.963)
  Bottom Layer w0.4: 6.2,5.6 6.21,5.61 Q1.G
  other v1: 1.4,1.8 2.5,1.8 3.4,1.8 1.4,2.5 2.4,2.5 3.3,2.5 1.4,3.2 2.2,3.3 3.3,3.3 1.3,4 2.2,4 3.3,4 18.5,5.5 38.9,5.5 14.1,5.6 17.6,5.6 28.2,5.6 29.7,5.6 8.4,5.8 40.9,5.8 43,5.8 45.1,5.8 11.525,5.885 24.6,5.9 35.4,5.9 6.2,6.2 12.85,6.5 13.8,6.5 12.1,6.575 22,6.8 22.9,6.8 24.3,6.8 35.4,6.8 34.1,6.825 32.6,6.9 10.3,13.1 30.3,13.1 21.6,13.4 23.225,13.4 27.29,15.85 39.265,16.163 9.05,16.35
SWCLK: J9.04 U4.24 | length 11.6
  Top Layer w0.2: J9.04 15.27,33.575 15.94,32.905 19.239,32.905 20.981,34.647 U4.24
SWDIO: J9.02 U4.23 | length 10.2
  Top Layer w0.2: J9.02 20.369,34.6 21.395,35.627 25.175,35.627 25.45,35.352 25.45,34.798 U4.23
THROWER: J1.2 U5.11 | length 9
  Top Layer w0.2: J1.2 4.69,15.32 11.023,15.32 11.59,15.886 U5.11
THROWER_PW: U4.31 U5.6 | length 14.7
  Top Layer w0.2: U5.6 11.59,22.264 17.526,28.2 20.05,28.2 20.223,28.374 U4.31
TIM1_CH1: J2.3 U4.18 | length 30.1
  Top Layer w0.2: J2.3 5.61,41.7 24.1,41.7 v2(27.4,38.4) ; v2(29,38.3) 29.6,37.7 U4.18
  Bottom Layer w0.2: v2(27.4,38.4) 27.45,38.35 28.95,38.35 v2(29,38.3)
TIM1_CH2: J2.4 U4.19 | length 30.9
  Top Layer w0.2: J2.4 2.1,43.866 4.886,41.08 21.42,41.08 v2(25.816,36.684) ; v2(27.25,36.55) 27.327,36.473 27.528,36.473 28.55,35.451 28.55,35.326 28.8,35.076 U4.19
  Bottom Layer w0.2: v2(25.816,36.684) 25.883,36.617 27.183,36.617 v2(27.25,36.55)
TIM2_CH1: J3.3 U4.27 | length 19.7
  Top Layer w0.2: J3.3 7.01,31.6 23.3,31.6 U4.27
TIM2_CH2: J3.4 U4.28 | length 23.1
  Top Layer w0.2: J3.4 2.1,35.166 4.445,32.822 4.592,32.822 6.614,30.8 23.3,30.8 U4.28
TIM3_CH1: J4.3 U4.29 | length 28.1
  Top Layer w0.2: J4.3 2.026,25.17 1.15,26.046 1.15,26.834 3.416,29.1 18.3,29.1 19.2,30 23.3,30 U4.29
TIM3_CH2: J4.4 U4.30 | length 22.4
  Top Layer w0.2: J4.4 4.26,28.6 18.5,28.6 19.1,29.2 23.3,29.2 U4.30
USB_DM: J11.2 J.4 U4.21 | length 19.3
  Top Layer w0.2: U4.21 27.2,34.218 27.45,33.968 27.45,33.843 27.625,33.668 31.014,33.668 32.596,35.25 32.699,35.25 37.962,40.513 39.822,40.513 40.742,41.433 41.38,41.433 41.563,41.25 42.325,41.25 J11.2
USB_DP: J11.3 J.3 U4.22 | length 21.2
  Top Layer w0.2: U4.22 26.4,36.549 32.684,42.833 J.3 39.161,42.488 39.816,41.833 42.392,41.833 J11.3
pads on no net: J1.3 J1.4 J1.5 J2.5 J3.5 J4.5 J9.06 J9.07 J9.08 J11. J11.4 J.1 U1.1 U1.13 U2.1 U2.13 U3.1 U3.13 U4.2 U4.3 U4.11 U4.12 U4.13 U4.20 U4.26 U5.7 U5.10 U6.7 U6.10 U7.4 U8.4

## Polygon pours and split planes (outlines as drawn)
+3.3 on Bottom Layer "+3.3_L04_P004" (solid, remove dead copper, pour order 4): 0.5,45.8 0.6,45.7 0.6,20.7 45,20.7 46.1,21.8 46.1,45.8 43.9,45.8 43.8,45.9
+16 on Bottom Layer "+16_L04_P001" (solid, remove dead copper, pour order 1): 0,7.9 0,12.5 46.1,12.5 46.1,7.9
+5 on Bottom Layer "+5_L04_P003" (solid, remove dead copper, pour order 3): 8.6,16.998 8.6,13 40,13 40,16.998
PGND on Bottom Layer "PGND_L04_P000" (solid, remove dead copper, pour order 0): 0,7 46.1,7 46.1,0.5 0,0.5
NetJ10_1 on Top Layer "NETJ10_1_L01_P017" (solid, remove dead copper, pour order 17): 12.7,7.4 9.9,7.4 9.5,7 9.5,0.8 12.7,0.8
NetJ13_1 on Top Layer "NETJ13_1_L01_P015" (solid, remove dead copper, pour order 15): 13,7.4 15.8,7.4 16.2,7 16.2,0.8 13,0.8
NetJ5_1 on Top Layer "NETJ5_1_L01_P014" (solid, remove dead copper, pour order 14): 34,7.7 31.5,7.7 30.8,7 30.8,1 34,1
NetJ6_1 on Top Layer "NETJ6_1_L01_P012" (solid, remove dead copper, pour order 12): 34.2,7.7 36.5,7.7 37.5,6.7 37.5,1 34.2,1
NetJ7_1 on Top Layer "NETJ7_1_L01_P006" (solid, remove dead copper, pour order 6): 23.1,7.7 23.1,1 19.6,1 19.6,7.7
NetJ8_1 on Top Layer "NETJ8_1_L01_P005" (solid, remove dead copper, pour order 5): 23.3,1 23.3,7.7 27.1,7.7 27.1,1
GND on Int2 (GND) (split plane): 46.09,20.397 46,20.402 0.6,20.402 0.51,20.397 0.51,45.59 46.09,45.59
PGND on Int2 (GND) (split plane): 46.09,0.51 0.51,0.51 0.51,17.403 0.6,17.398 46,17.398 46.09,17.403
GND on Int1 (GND) (split plane): 46.09,20.472 45.968,20.493 45.8,20.502 0.8,20.502 0.632,20.493 0.51,20.472 0.51,45.59 46.09,45.59
PGND on Int1 (GND) (split plane): 0.632,17.507 0.8,17.498 45.8,17.498 45.968,17.507 46.09,17.528 46.09,0.51 0.51,0.51 0.51,17.528

## Other copper
Top Layer:
  text "BTS" at 21.2,43.4 h1.52
Int1 (GND) (plane layer: these items are gaps in the copper):
  lines w3: 0.8,19 45.8,19
Int2 (GND) (plane layer: these items are gaps in the copper):
  lines w3: 0.6,18.9 46,18.9

## Silkscreen, mask and mechanical layers (free items; w line width, h text height)
Top Overlay:
  text "+" at 4.554,8.6 h1.52
Mechanical 1:
  the board outline again, w1.2

## Text inside footprints (layer, text, board x,y; h text height)
J11: Mechanical 13 "PCB END" at 46.4,46.55 h0.41 r90
U4: Top Overlay "*" at 24.654,24.468 h1.27 r90; Mechanical 13 "*" at 25.035,26.843 h1.27 r90; Mechanical 7 "Default Horiz Padstyle: RX19p72Y53p5D0T" at 38.605,17.991 h1.27 r90; Mechanical 7 "Default Vert Padstyle: RX19p72Y53p5D0T" at 40.129,18.309 h1.27 r90; Mechanical 7 "Alt 1 Padstyle: OX60Y90D30P" at 44.701,21.801 h1.27 r90; Mechanical 7 "Alt 2 Padstyle: OX90Y60D30P" at 46.225,21.801 h1.27 r90; Mechanical 7 "0.031in/0.8mm" at 25.518,38.076 h0.64 r90; Mechanical 7 "0.03in/0.762mm" at 19.897,32.367 h0.64 r90; Mechanical 7 "0.362in/9.195mm" at 17.992,27.992 h0.64 r90; Mechanical 7 "0.283in/7.188mm" at 35.938,27.992 h0.64 r90; Mechanical 7 "0.283in/7.188mm" at 27.918,17.909 h0.64 r90; Mechanical 7 "0.362in/9.195mm" at 27.918,39.981 h0.64 r90
U5: Top Overlay "*" at 18.346,22.371 h1.27 r270; Mechanical 13 "*" at 17.102,21.006 h1.27 r270; Mechanical 7 "0.05in/1.27mm" at 5.494,23.686 h0.64 r270; Mechanical 7 "0.05in/1.27mm" at 16.987,28.975 h0.64 r270; Mechanical 7 "0.39in/9.906mm" at 13.177,14.033 h0.64 r270; Mechanical 7 "0.244in/6.2mm" at 22.766,21.139 h0.64 r270; Mechanical 7 "0.157in/3.988mm" at 20.861,21.456 h0.64 r270; Mechanical 7 "Alt 2 Padstyle: OX90Y60D30P" at -4.158,27.648 h1.27 r270; Mechanical 7 "Alt 1 Padstyle: OX60Y90D30P" at -2.634,27.648 h1.27 r270; Mechanical 7 "Pin One Padstyle: RX57p55Y21D0T" at 1.938,28.918 h1.27 r270; Mechanical 7 "Default Padstyle: RX57p55Y21D0T" at 3.462,28.918 h1.27 r270
U6: Top Overlay "*" at 36.586,21.872 h1.27 r270; Mechanical 13 "*" at 35.342,20.506 h1.27 r270; Mechanical 7 "0.05in/1.27mm" at 23.734,23.186 h0.64 r270; Mechanical 7 "0.05in/1.27mm" at 35.228,28.476 h0.64 r270; Mechanical 7 "0.39in/9.906mm" at 31.418,13.533 h0.64 r270; Mechanical 7 "0.244in/6.2mm" at 41.006,20.639 h0.64 r270; Mechanical 7 "0.157in/3.988mm" at 39.101,20.956 h0.64 r270; Mechanical 7 "Alt 2 Padstyle: OX90Y60D30P" at 14.082,27.148 h1.27 r270; Mechanical 7 "Alt 1 Padstyle: OX60Y90D30P" at 15.606,27.148 h1.27 r270; Mechanical 7 "Pin One Padstyle: RX57p55Y21D0T" at 20.178,28.418 h1.27 r270; Mechanical 7 "Default Padstyle: RX57p55Y21D0T" at 21.702,28.418 h1.27 r270